# EAGLE board UV LED Lamp (EAGLE 9.6.2)
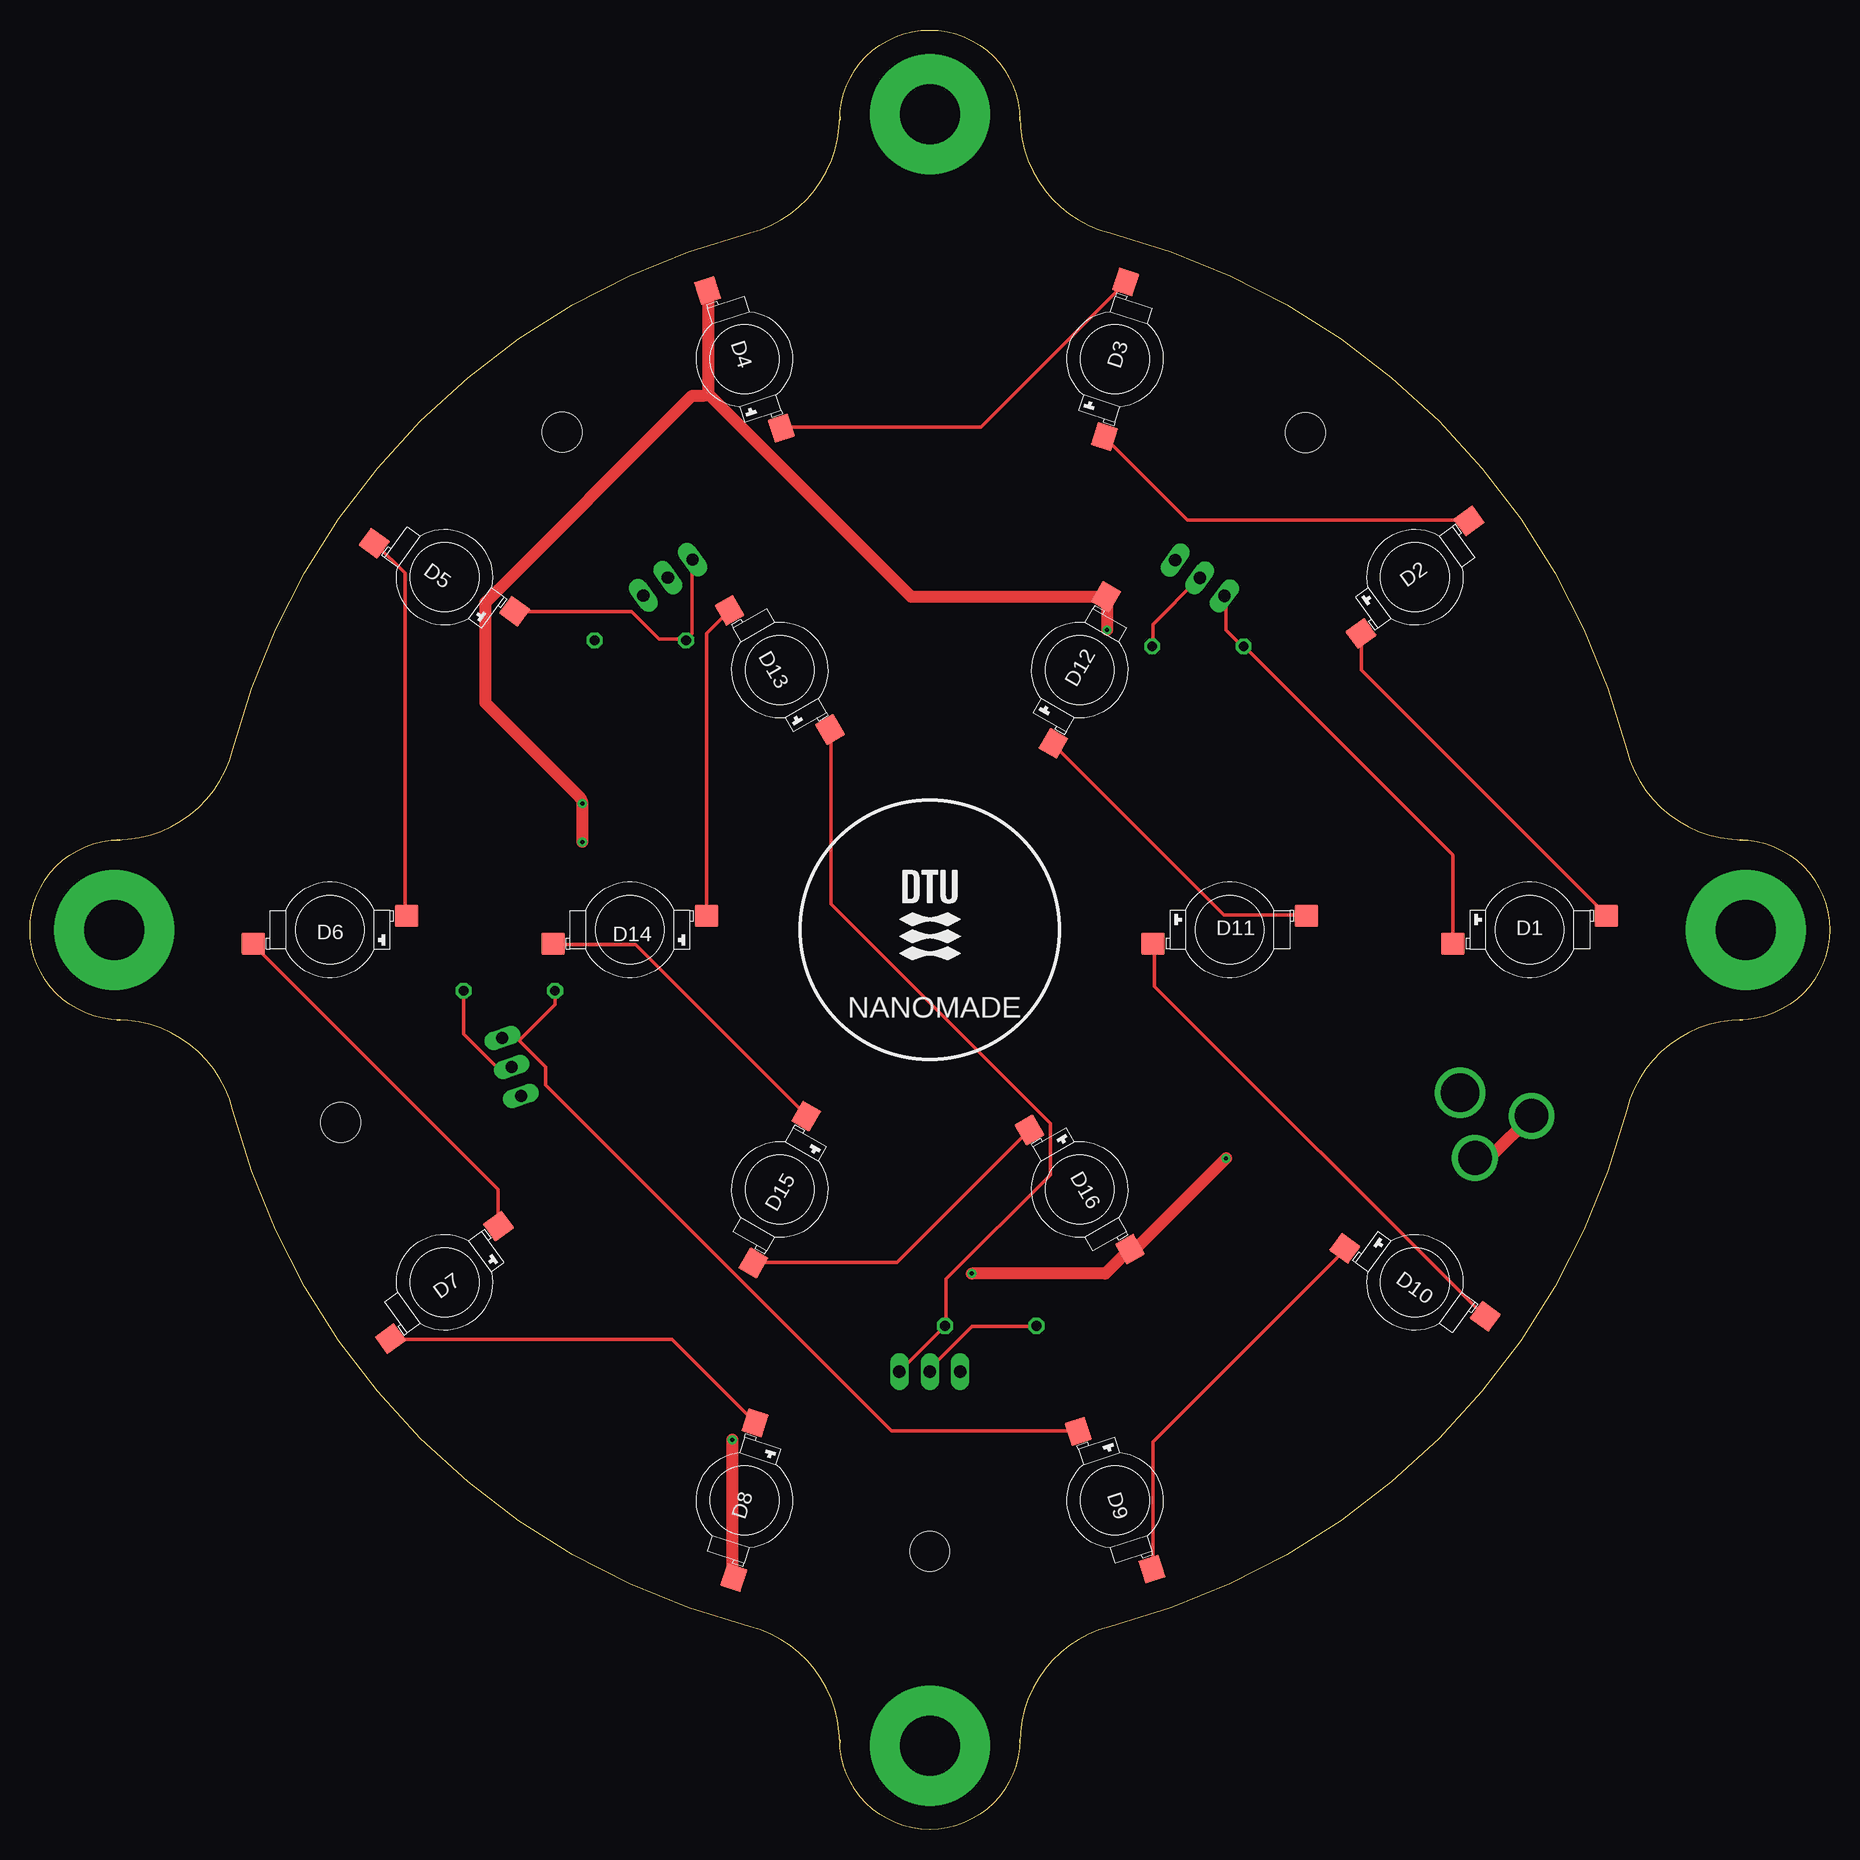
[diagram p0: board, top side]
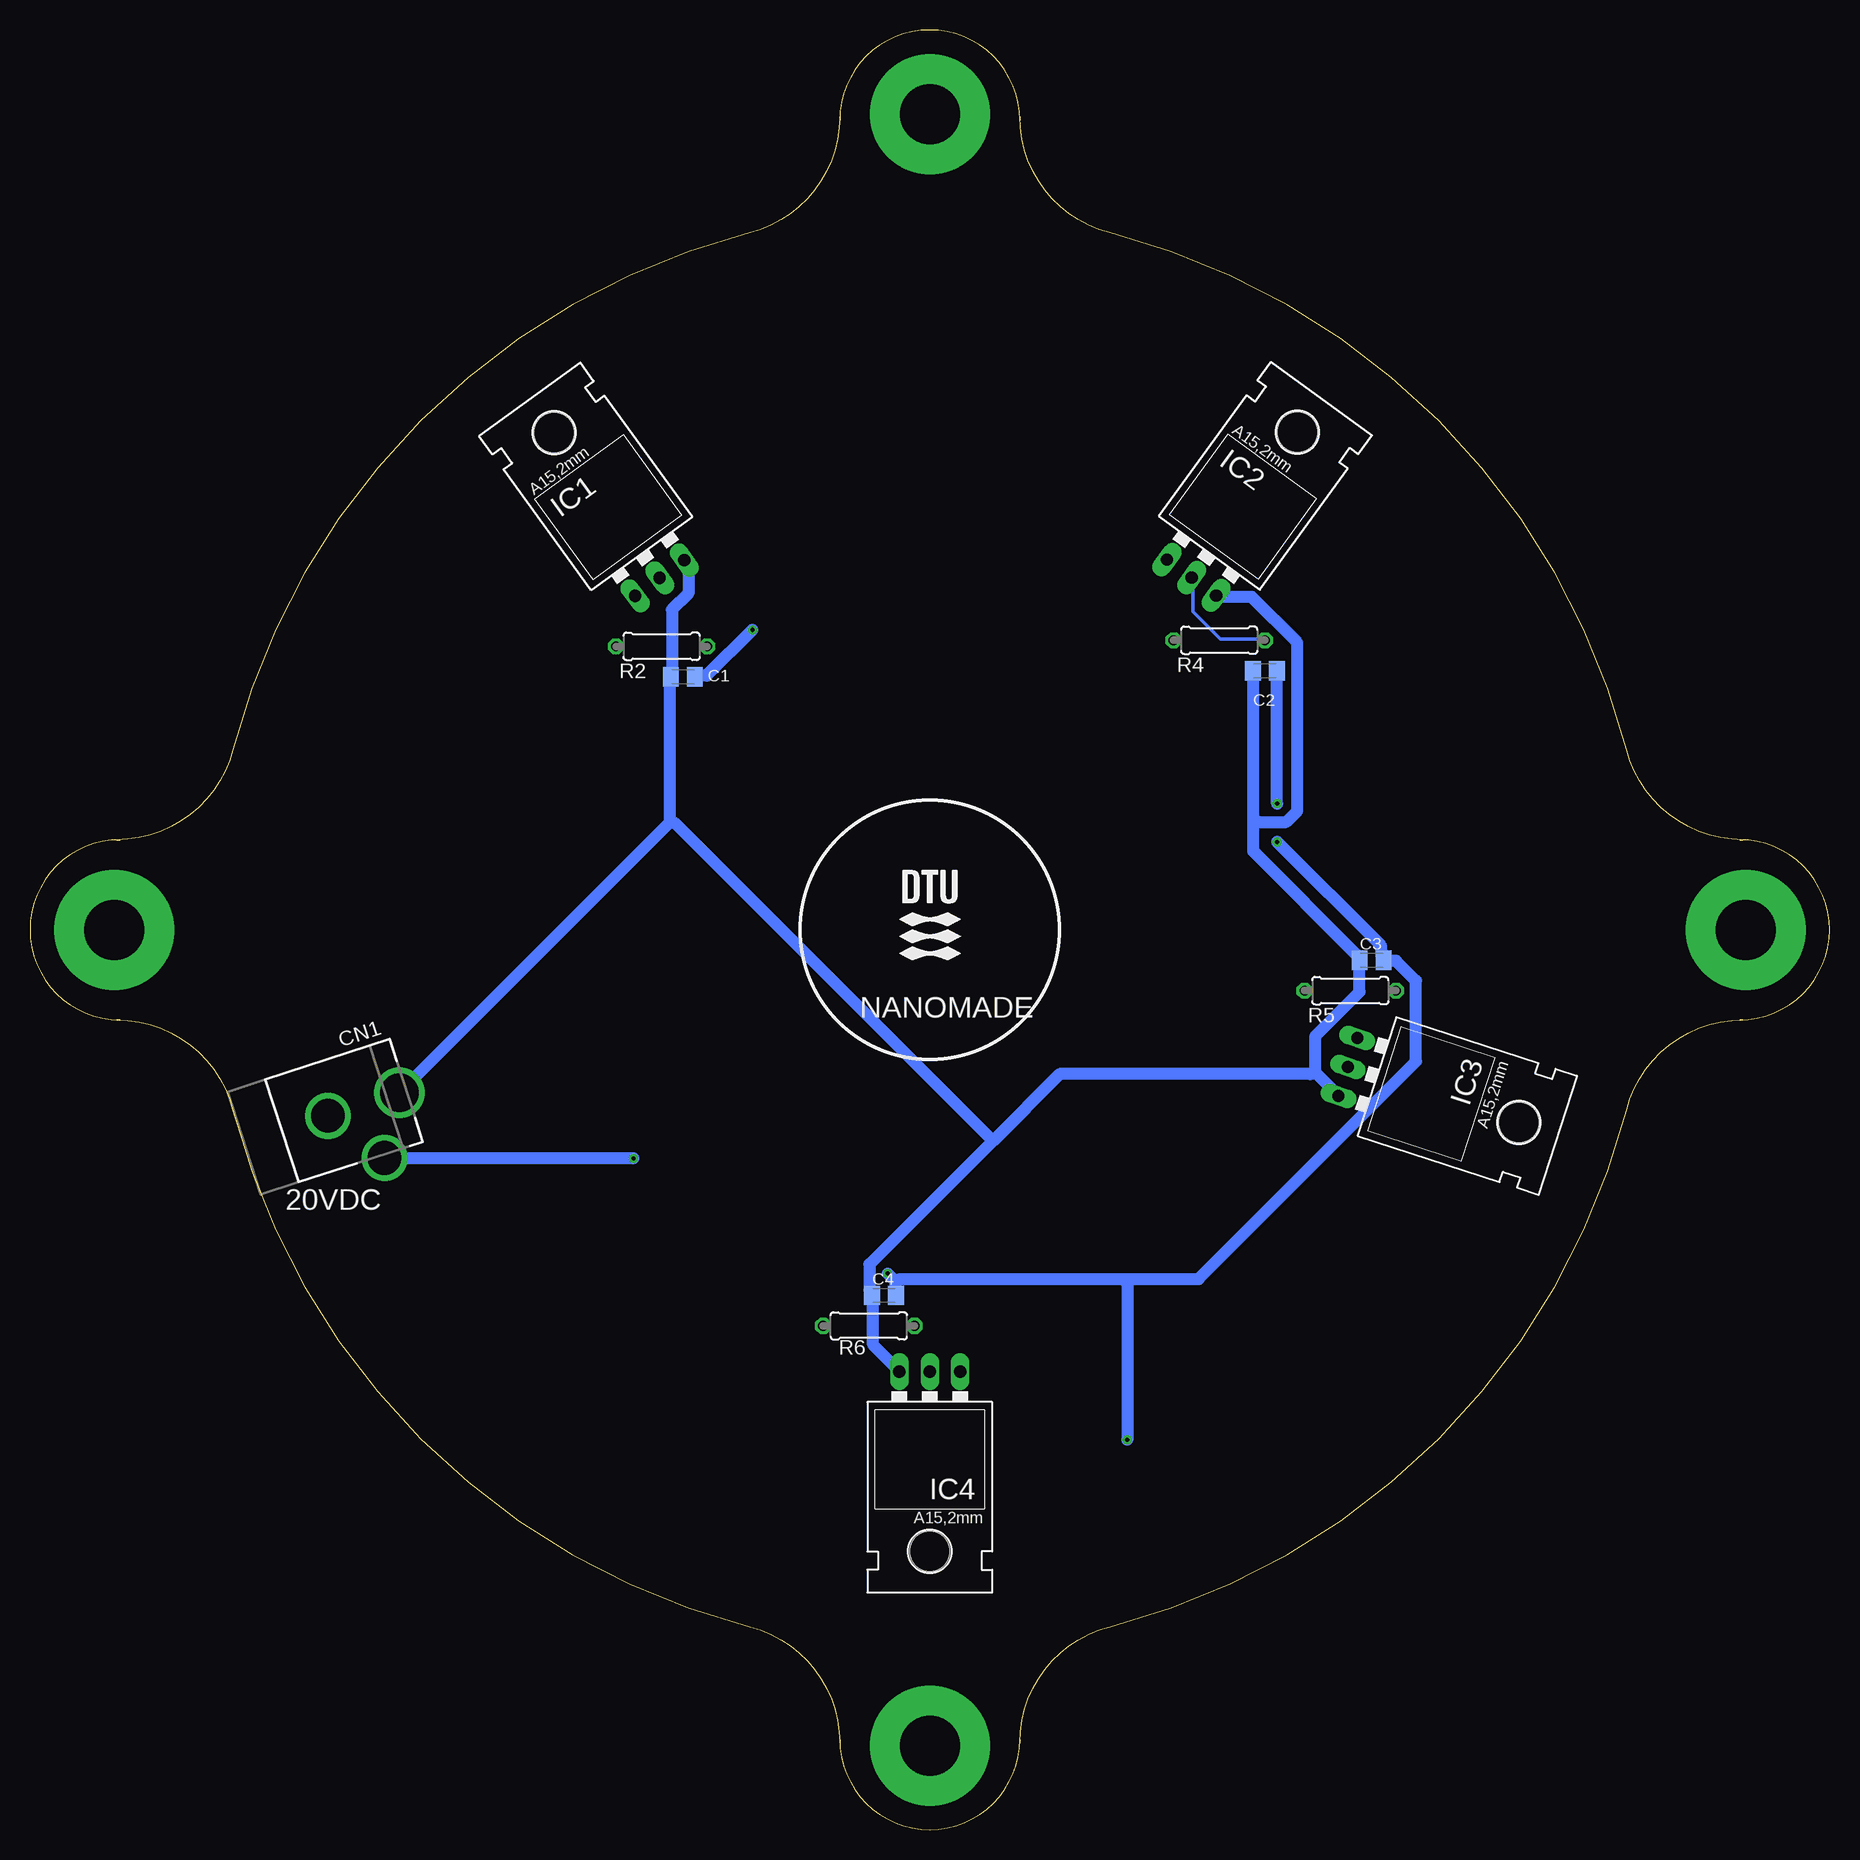
[diagram p1: board, bottom side, seen from below]

Size 150 x 150 mm. Coordinates in mm from the lower left corner, seen from the top.
Outline: 82.5,7.5 arc-180 67.5,7.5 67.5,7.22 arc76 60,16.91 arc-61 16.91,60 arc76 7.22,67.5 7.5,67.5 arc-180 7.5,82.5 7.22,82.5 arc76 16.91,90 arc-61 60,133.09 arc76 67.5,142.78 67.5,142.5 arc-180 82.5,142.5 82.5,142.78 arc76 90,133.09 arc-61 133.09,90 arc76 142.78,82.5 142.5,82.5 arc-180 142.5,67.5 142.78,67.5 arc76 133.09,60 arc-61 90,16.91 arc76 82.5,7.22 82.5,7.5
Copper layers (1*16): Top 0.035mm / dielectric 1.5mm / Bottom 0.035mm
Design rules "default": minimum track width 6mil, minimum drill 0.35mm, track to track 6mil, track to pad 6mil, pad to pad 6mil, via to via 6mil, smd to smd 6mil, copper to edge 40mil, drill to drill 6mil, minimum pad ring 10mil, minimum via ring 8mil, stop-mask expansion 4mil, vias tented up to drill 0mil, thermal gap 10mil
Net classes: 0 default: width 0.305 mm, clearance 0.305 mm; 1 POWER: width 1.016 mm, clearance 0.508 mm

## Footprints (pad centres in the part's own frame; a part is rotated, then mirrored left to right if it is on the bottom)
C0805K = smd 1.3 x 1.6: 1 -1,0; 2 1,0
DCJACK_2MM_PTH = drill 2.8: GND 0,7.35; GNDBREAK 4.8,10.75 | drill 3.2: PWR 0,13.6
PM2L-1LLE-LC = smd 2 x 1.8: P$1 6.4,1.15; P$2 -6.4,-1.15
317TL = drill 1.016 long: 1 -2.54,-3.81; 2 0,-3.81; 3 2.54,-3.81 | hole 3.302: 0,11.176
0207/7 = drill 0.813 octagon: 1 -3.81,0; 2 3.81,0

## Placement (x,y rotation side)
C1  [C0805K]  95.57,96.08 0 bottom
C2  [C0805K]  47.06,96.59 0 bottom
C3  [C0805K]  38.17,72.46 0 bottom
C4  [C0805K]  78.81,44.52 0 bottom
CN1  [DCJACK_2MM_PTH]  132.15,57.22 288 bottom
D1  PM2L-1LLE-LC  [PM2L-1LLE-LC]  125,75 0 top
D2  PM2L-1LLE-LC  [PM2L-1LLE-LC]  115.45,104.39 36 top
D3  PM2L-1LLE-LC  [PM2L-1LLE-LC]  90.45,122.55 72 top
D4  PM2L-1LLE-LC  [PM2L-1LLE-LC]  59.55,122.55 108 top
D5  PM2L-1LLE-LC  [PM2L-1LLE-LC]  34.55,104.39 144 top
D6  PM2L-1LLE-LC  [PM2L-1LLE-LC]  25,75 180 top
D7  PM2L-1LLE-LC  [PM2L-1LLE-LC]  34.55,45.61 216 top
D8  PM2L-1LLE-LC  [PM2L-1LLE-LC]  59.55,27.45 252 top
D9  PM2L-1LLE-LC  [PM2L-1LLE-LC]  90.45,27.45 288 top
D10  PM2L-1LLE-LC  [PM2L-1LLE-LC]  115.45,45.61 324 top
D11  PM2L-1LLE-LC  [PM2L-1LLE-LC]  100,75 0 top
D12  PM2L-1LLE-LC  [PM2L-1LLE-LC]  87.5,96.65 60 top
D13  PM2L-1LLE-LC  [PM2L-1LLE-LC]  62.5,96.65 120 top
D14  PM2L-1LLE-LC  [PM2L-1LLE-LC]  50,75 180 top
D15  PM2L-1LLE-LC  [PM2L-1LLE-LC]  62.5,53.35 240 top
D16  PM2L-1LLE-LC  [PM2L-1LLE-LC]  87.5,53.35 300 top
IC1  LM317T  [317TL]  99.75,107.41 36 bottom
IC2  LM317T  [317TL]  50.93,107.44 324 bottom
IC3  LM317T  [317TL]  36.52,62.38 252 bottom
IC4  LM317T  [317TL]  75,34.36 180 bottom
R2  3.57  [0207/7]  97.35,98.62 180 bottom
R4  3.57  [0207/7]  50.87,99.13 180 bottom
R5  3.57  [0207/7]  39.95,69.92 180 bottom
R6  3.57  [0207/7]  80.08,41.98 0 bottom
U$1  DTU_LOGO  [DTU_LOGO]  72.46,72.46 0 top
U$2  DTU_LOGO  [DTU_LOGO]  77.54,72.46 0 bottom

## Library data of the parts
C1-C4 = rcl; SPICEPREFIX: C
CN1 = adafruit
D1-D16 = DTU Nanomade; DATASHEET: https://docs.rs-online.com/1223/0900766b81443a20.pdf
IC1-IC4 = Electronics
R2 R4-R6 = rcl; SPICEPREFIX: R
U$1 U$2 = Logotypes

## Nets
GND [POWER]: C1.2 C2.2 C3.2 C4.2 CN1.GND CN1.GNDBREAK D4.P$1 D8.P$1 D12.P$1 D16.P$1
N$1: D1.P$1 D2.P$2
N$2: D2.P$1 D3.P$2
N$3: D3.P$1 D4.P$2
N$4: IC1.2 R2.1
N$5: D6.P$1 D7.P$2
N$6: D7.P$1 D8.P$2
N$7: IC2.2 R4.1
N$8: D9.P$1 D10.P$2
N$9: D14.P$1 D15.P$2
N$10: D13.P$1 D14.P$2
N$11: IC3.2 R5.1
N$12: D11.P$1 D12.P$2
N$13: D5.P$1 D6.P$2
N$14: D10.P$1 D11.P$2
N$15: D15.P$1 D16.P$2
N$16: IC4.2 R6.1
N$17: D1.P$2 IC1.1 R2.2
N$18: D5.P$2 IC2.1 R4.2
N$19: D9.P$2 IC3.1 R5.2
N$20: D13.P$2 IC4.1 R6.2
VCC [POWER]: C1.1 C2.1 C3.1 C4.1 CN1.PWR IC1.3 IC2.3 IC3.3 IC4.3

## Tracks (layer width: path | path; a pad name or v marks a point on that pad's centre or on a via)
GND  (via drill 0.35)
  Top 1.016: v89.78,99.99 89.78,102.74 D12.P$1 89.17,102.74 73.48,102.74 56.56,119.65 | 56.56,119.65 56.56,128.19 D4.P$1 | CN1.GNDBREAK 120.57,56.1 121.79,56.1 125.14,59.45 CN1.GND | v78.5,46.35 89.63,46.35 91.61,48.33 D16.P$1 92.22,48.48 v99.69,55.95 | v46.04,82.31 v46.04,85.52 45.89,85.97 37.97,93.9 37.97,102.28 55.19,119.5 56.1,119.5 56.56,119.65 | v58.54,32.48 58.54,21.05 D8.P$1
  Bottom 1.016: v89.78,99.99 93.59,96.18 94.51,96.18 C1.2 | 77.9,45.74 77.9,44.52 C4.2 | v78.5,46.35 77.9,45.74 | 58.54,45.89 77.44,45.89 77.9,45.74 | 58.54,45.89 52.6,45.89 34.46,64.03 34.46,70.73 36.14,72.41 37.05,72.41 C3.2 37.36,72.87 37.36,73.63 v46.04,82.31 | v46.04,85.52 46.04,96.49 C2.2 | v58.54,32.48 58.54,45.43 58.54,45.89 | v99.69,55.95 120.41,55.95 CN1.GNDBREAK
N$1
  Top 0.305: D2.P$2 110.97,99.69 110.97,96.64 131.39,76.22 D1.P$1
N$2
  Top 0.305: D2.P$1 119.81,109.14 96.49,109.14 89.63,116 D3.P$2
N$3
  Top 0.305: D4.P$2 62.66,116.91 79.27,116.91 91.31,128.95 D3.P$1
N$4
  Top 0.305: R2.1 93.59,98.62 93.59,100.45 97.4,104.26 IC1.2
N$5
  Top 0.305: D7.P$2 39.03,50.31 39.03,53.36 18.61,73.78 D6.P$1
N$6
  Top 0.305: D7.P$1 30.19,40.86 53.51,40.86 60.37,34 D8.P$2
N$7
  Bottom 0.305: R4.1 47.11,99.23 50.77,99.23 53.05,101.52 53.05,104.26 IC2.2
N$8
  Top 0.305: D9.P$1 93.59,21.81 93.59,32.33 109.59,48.33 D10.P$2
N$9
  Top 0.305: D14.P$1 43.61,73.78 50.46,73.78 64.64,59.61 D15.P$2
N$10
  Top 0.305: D14.P$2 56.41,76.22 56.41,99.69 58.24,101.52 D13.P$1
N$11
  Top 0.305: R5.1 36.14,69.82 36.14,66.31 38.88,63.57 40.1,63.57 IC3.2
N$12
  Top 0.305: D11.P$1 106.39,76.22 99.54,76.22 85.36,90.39 D12.P$2
N$13
  Top 0.305: D6.P$2 31.26,76.22 31.26,104.72 28.82,107.16 D5.P$1
N$14
  Top 0.305: D11.P$2 93.75,73.78 93.75,70.28 121.18,42.84 D10.P$1
N$15
  Top 0.305: D15.P$1 60.37,47.26 72.26,47.26 83.23,58.24 D16.P$2
N$16
  Top 0.305: R6.1 83.84,41.93 78.5,41.93 75,38.42 75,38.27 IC4.2
N$17
  Top 0.305: D1.P$2 118.59,73.93 118.59,81.25 101.21,98.62 R2.2 101.06,98.62 99.69,99.99 99.69,102.74 IC1.1
N$18
  Top 0.305: D5.P$2 40.41,101.52 50.16,101.52 52.45,99.23 54.58,99.23 R4.2 54.73,99.23 55.19,99.69 55.19,105.78 IC2.1
N$19
  Top 0.305: 40.79,65.78 40.71,65.86 39.49,65.86 IC3.1 | 40.79,65.78 43,63.57 43,62.05 71.8,33.24 87.34,33.24 D9.P$2 | R5.2 43.76,69.82 43.76,68.75 40.86,65.86 40.79,65.78
N$20
  Top 0.305: D13.P$2 66.77,91.61 66.77,77.13 85.06,58.85 85.06,54.58 76.37,45.89 76.37,42.08 R6.2 76.22,41.93 72.56,38.27 IC4.1
N$21  (via drill 5 pad 10)
  other vias: 75,143
N$22  (via drill 5 pad 10)
  other vias: 143,75
N$23  (via drill 5 pad 10)
  other vias: 75,7
N$24  (via drill 5 pad 10)
  other vias: 7,75
VCC
  Bottom 1.016: IC1.3 95.42,105.78 95.12,105.48 95.12,103.04 96.49,101.67 96.49,96.18 C1.1 96.64,95.57 96.64,83.99 | 96.64,83.99 119.2,61.44 CN1.PWR | IC4.3 77.59,38.27 79.72,40.41 79.72,44.52 C4.1 80.03,44.98 80.03,47.11 69.74,57.4 | 42.84,63.11 42.84,66.16 39.19,69.82 39.19,72.41 C3.1 39.34,72.87 48.02,81.55 48.02,83.99 | 42.84,63.11 41.02,61.28 IC3.3 | 48.02,83.99 48.02,96.49 C2.1 | IC2.3 51.07,102.74 48.18,102.74 44.37,98.93 44.37,84.91 45.28,83.99 47.57,83.99 48.02,83.99 | 69.74,57.4 64.18,62.96 43.3,62.96 42.84,63.11 | 96.64,83.99 96.18,83.84 69.97,57.63 69.74,57.4

## Text on the board
tPlace: NANOMADE
bPlace: NANOMADE | 20VDC